# Altium PCB PCB1.PcbDoc
Units mil, origin at the board's own origin, x right, y up, seen from the top; angles counter-clockwise.
Board outline 4500 x 2600 mil, 2 copper layers (Top Layer, Bottom Layer), stack 60.4 mil thick; 2 components, 0 nets, 6 pads, 0 vias.
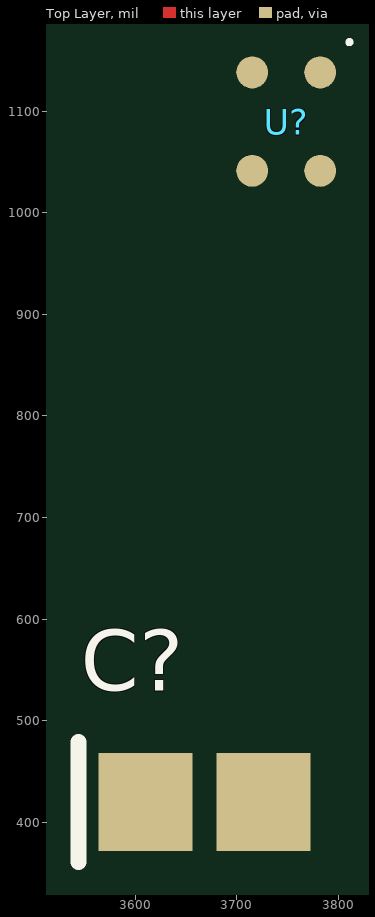
[diagram p0: Top Layer view]
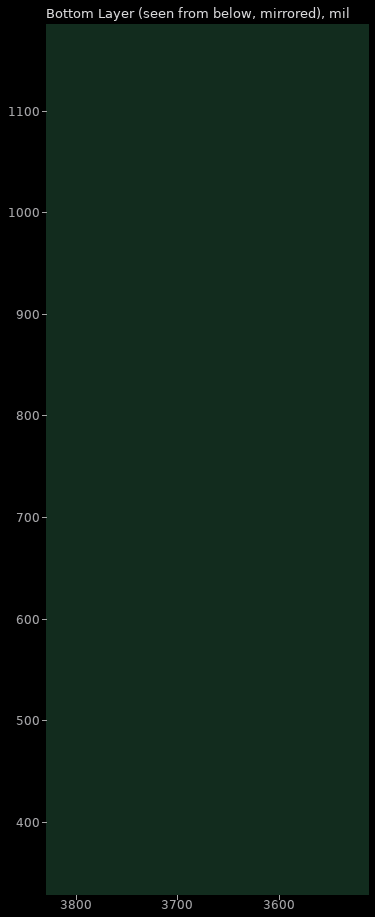
[diagram p1: Bottom Layer view, seen from below]

## Layer stack, top to bottom
Top Solder: solder mask 0.5, Solder Resist, Dk 3.3
Top Layer: signal copper 0.7
Dielectric1: core 59, FR-4, Dk 4.3
Bottom Layer: signal copper 0.7
Bottom Solder: solder mask 0.5, Solder Resist, Dk 3.3

## Board outline
0,0 4500,0 4500,2600 0,2600

## Design rules (kind name [scope] priority, off if disabled: settings)
Clearance [All] p1: gap=10 ignorepadtopadclearanceinfootprint=FALSE
DiffPairsRouting [All] p1: maxlimit=10 minlimit=10 mostfreqgap=10 toplayer_minwidth=10 toplayer_maxwidth=10 toplayer_prefwidth=10 bottomlayer_minwidth=10 bottomlayer_maxwidth=10 bottomlayer_prefwidth=10 maxuncoupledlength=500
HoleSize [All] p1: absolutevalues=TRUE maxlimit=300 minlimit=10 maxpercent=80.000 minpercent=20.000
MinimumAnnularRing [All] p1: minimumring=10
PasteMaskExpansion [All] p1: expansion=10
PlaneClearance [All] p1: clearance=15
PlaneConnect [All] p1: pad.planeconnectstyle=Relief pad.reliefexpansion=20 pad.reliefentries=4 pad.reliefconductorwidth=10 pad.reliefairgap=10 via.planeconnectstyle=Direct via.reliefexpansion=20 via.reliefentries=4 via.reliefconductorwidth=10 via.reliefairgap=10
PolygonConnect [All] p1: thpad.connectstyle=Relief thpad.reliefconductorwidth=10 thpad.reliefentries=4 thpad.polygonreliefangle="90 Angle" thpad.airgapwidth=10 smdpad.connectstyle=Relief smdpad.reliefconductorwidth=10 smdpad.reliefentries=4 smdpad.polygonreliefangle="90 Angle" smdpad.airgapwidth=10 via.connectstyle=Direct via.reliefconductorwidth=10 via.reliefentries=4 via.polygonreliefangle="90 Angle" via.airgapwidth=10
RoomDefinition Sheet1 [InComponentClass('Sheet1')] p1: confinementstyle=ConfineIn formatcopy=TRUE lockcomponents=FALSE outline 3674.54,998.57 3822.54,998.57 3822.54,1280.57 3674.54,1280.57
RoutingVias [All] p1: holewidth=10 width=20 viastyle="Through Hole" minholewidth=10 minwidth=20 maxholewidth=10 maxwidth=20
SMDNeckDown [All] p1: percent=100.000
SilkToSolderMaskClearance SilkscreenOverComponentPads [IsPad] p1: minsilkscreentomaskgap=10 clearancetoexposedcopper=TRUE
SolderMaskExpansion [All] p1: expansion=10 istentingtop=FALSE
Width [All] p1: maxlimit=10 minlimit=10 preferedwidth=10
24 further rules are at their usual default settings.

## Components (designator, comment, footprint, x,y, rotation, side; value= is the part's Value field where it differs from the comment)
C? "TAJB226K016RNJ" AVX-TAJ-B-2_M 3668,420 r0 top value=22µF
U? "SPU0409HD5H-PB" KNOW-SPU0409HD5H-PB_V 3748.54,1089.57 r0 top

## Footprints (in the part's own frame and the unit in brackets; to place one, negate y for a bottom-side part, rotate by r counter-clockwise, add the part's x,y. Pads: shape width x height; smd on the part's side, far side on the other; paste and mask are expansions set on the pad)
AVX-TAJ-B-2_M [mm] "Molded Capacitor, 2-Leads, Body 3.7x3mm, IPC Low Density"
  rect 2.35x2.45 smd: 1(-1.475,0) 2(1.475,0)
  silkscreen extent -3.15,-1.5 -3.15,1.5, body extent -2.07,-1.5 2.07,1.5, height 2.1
KNOW-SPU0409HD5H-PB_V [mm] "SMD, 4-Leads, Body 3.76x2.95mm"
  round 0.8 smd paste-1: 1(0.85,1.23) 4(-0.85,1.23)
  round 0.8 smd paste+0: 2(0.85,-1.23) 3(-0.85,-1.23)
  silkscreen extent 1.53,1.94 1.63,2.04, body extent -1.47,-1.88 1.48,1.88, height 0.9

## Part data
C?: library part CMP-001-00044-5, "Standard Tantalum, 22 uF, +/- 10%, 16 V, -55 to 125 degC, 1210 (3528 Metric), RoHS, Tape and Reel", Capacitor Type=Tantalum, Case/Package=1210, Manufacturer=AVX, Max Operating Temperature=125°C, Min Operating Temperature=-55°C, Package Description="2-Pin Surface Mount Device, Body 3.5 x 2.85 mm", Package Quantity=2000, Package Reference=TAJ-B-2, Tolerance=10%, Voltage Rating=16V, Datasheet URL=http://datasheets.avx.com/TAJ.pdf, Datasheet Version=Feb-16, ESR=2.3Ohm, Manufacturer URL=http://www.avx.com/, Mounting Technology=SM, Packaging=TapeandReel, Pins=2, RoHS Compliant=True
U?: library part CMP-00027-00001-1, "SiSonic(TM) Microphone, 1.5 to 3.6 V, -40 to 100 degC, 4-Pin SMD, RoHS, Tape and Reel", Manufacturer="Knowles Acoustics", Package Description="4-Pin Surface Mount Device, Body 3.76 x 2.95 mm", Package Quantity=1200, Voltage Rating=3.6V, Case/Package=SPU0409HD5H-PB, Datasheet URL=http://datasheet.octopart.com/SPU0409HD5H-PB-Knowles-Acoustics-datasheet-17019172.pdf, Datasheet Version="Rev. F, 03/2013", Impedance=100Ohm, Manufacturer URL=http://www.knowles.com/, Mounting Technology=SM, Package Reference=SPU0409HD5H-PB, Packaging=TapeandReel, RoHS Compliant=True

## Nets (pads, with @x,y where several pads share a name; then routed paths per layer and width w, separated by ;. In a path a pad name is that pad's centre, name@x,y a point inside that pad or via, vN(x,y) a via of type N, cw(c..) or ccw(c..) an arc to the next point about the centre after c; other vN are vias at no path point)
pads on no net: C?.1 C?.2 U?.1 U?.2 U?.3 U?.4